# EAGLE board Mini games (EAGLE 9.7.0)

Size 202.73 x 241.54 mm. Coordinates in mm from the lower left corner, seen from the top.
Outline: 0,0 202.73,0 202.73,241.54 0,241.54 0,0
Copper layers (1*16): Top 0.035mm / dielectric 1.5mm / Bottom 0.035mm
Design rules "default": minimum track width 6mil, minimum drill 0.35mm, track to track 6mil, track to pad 6mil, pad to pad 6mil, via to via 6mil, smd to smd 6mil, copper to edge 40mil, drill to drill 6mil, minimum pad ring 10mil, minimum via ring 8mil, stop-mask expansion 4mil, vias tented up to drill 0mil, thermal gap 10mil

## Footprints (pad centres in the part's own frame; a part is rotated, then mirrored left to right if it is on the bottom)
RESAD1016W63L850D250B = drill 0.83 pad 1.43: 1 -5.08,0; 2 5.08,0
SWITCH-MOMENTARY-PTH-6.5MM = drill 1.016 pad 1.88: 1 -3.251,2.261; 2 3.251,2.261; 3 -3.251,-2.261; 4 3.251,-2.261
JHD-162A = drill 1.016 long: 1 -19.05,0; 2 -16.51,0; 3 -13.97,0; 4 -11.43,0; 5 -8.89,0; 6 -6.35,0; 7 -3.81,0; 8 -1.27,0; 9 1.27,0; 10 3.81,0; 11 6.35,0; 12 8.89,0; 13 11.43,0; 14 13.97,0; 15 16.51,0; 16 19.05,0
ARDUINO-UNO-R3-SHIELD = drill 1.016 pad 1.88: 3.3V 24.13,-2.54; 5V 24.13,0; A0 24.13,12.7; A1 24.13,15.24; A2 24.13,17.78; A3 24.13,20.32; A4 24.13,22.86; A5 24.13,25.4; AREF -24.13,-13.97; D2 -24.13,20.32; D3 -24.13,17.78; D4 -24.13,15.24; D5 -24.13,12.7; D6 -24.13,10.16; D7 -24.13,7.62; D8 -24.13,3.81; D9 -24.13,1.27; D10 -24.13,-1.27; D11 -24.13,-3.81; D12 -24.13,-6.35; D13 -24.13,-8.89; GND@0 24.13,2.54; GND@1 24.13,5.08; GND@2 -24.13,-11.43; IOREF 24.13,-7.62; NC 24.13,-10.16; RES 24.13,-5.08; RX -24.13,25.4; SCL -24.13,-19.05; SDA -24.13,-16.51; TX -24.13,22.86; VIN 24.13,7.62

## Placement (x,y rotation side)
R1  1k  [RESAD1016W63L850D250B]  41.99,86.52 0 top
R2  1k  [RESAD1016W63L850D250B]  193.76,99.5 0 top
R3  1k  [RESAD1016W63L850D250B]  90.4,232.57 270 top
R4  1k  [RESAD1016W63L850D250B]  105.64,232.57 270 top
R8  1k  [RESAD1016W63L850D250B]  8.97,94.14 0 top
R9  1k  [RESAD1016W63L850D250B]  8.97,142.4 0 top
R10  1k  [RESAD1016W63L850D250B]  8.97,122.08 0 top
R11  1k  [RESAD1016W63L850D250B]  193.76,119.82 0 top
R12  1k  [RESAD1016W63L850D250B]  193.76,140.14 0 top
S1  SWITCH_MOMENTARY  [SWITCH-MOMENTARY-PTH-6.5MM]  174.71,117.28 0 top
S2  SWITCH_MOMENTARY  [SWITCH-MOMENTARY-PTH-6.5MM]  87.86,213.52 90 top
S3  SWITCH_MOMENTARY  [SWITCH-MOMENTARY-PTH-6.5MM]  174.71,96.96 0 top
S4  SWITCH_MOMENTARY  [SWITCH-MOMENTARY-PTH-6.5MM]  25.48,119.54 0 top
S5  SWITCH_MOMENTARY  [SWITCH-MOMENTARY-PTH-6.5MM]  103.1,213.52 90 top
S6  SWITCH_MOMENTARY  [SWITCH-MOMENTARY-PTH-6.5MM]  174.71,137.6 0 top
S7  SWITCH_MOMENTARY  [SWITCH-MOMENTARY-PTH-6.5MM]  25.48,139.86 0 top
S8  SWITCH_MOMENTARY  [SWITCH-MOMENTARY-PTH-6.5MM]  25.48,91.6 0 top
U2  LCD-16X2JHD-162A  [JHD-162A]  72.48,36.63 0 top
U3  ARDUINO-UNO-R3-SHIELD  [ARDUINO-UNO-R3-SHIELD]  98.8,143.82 90 top

## Library data of the parts
R1-R4 R8-R12 S1-S8 U2 U3 = Tinkercad

## Nets
U2_LED+: R1.1 U2.15
U3_5V: R1.2 S1.3 S1.4 S2.1 S2.2 S3.3 S3.4 S4.3 S4.4 S5.1 S5.2 S6.3 S6.4 S7.3 S7.4 S8.3 S8.4 U2.2 U3.5V
U3_A0: R4.2 S5.3 S5.4 U3.A0
U3_A1: R3.2 S2.3 S2.4 U3.A1
U3_D2: U2.11 U3.D2
U3_D3: U2.12 U3.D3
U3_D4: U2.13 U3.D4
U3_D5: U2.14 U3.D5
U3_D6: R8.2 S8.1 S8.2 U3.D6
U3_D7: R10.2 S4.1 S4.2 U3.D7
U3_D8: R9.2 S7.1 S7.2 U3.D8
U3_D9: R2.1 S3.1 S3.2 U3.D9
U3_D10: R11.1 S1.1 S1.2 U3.D10
U3_D11: R12.1 S6.1 S6.2 U3.D11
U3_D12: U2.6 U3.D12
U3_D13: U2.4 U3.D13
U3_GND: R2.2 R3.1 R4.1 R8.1 R9.1 R10.1 R11.2 R12.2 U2.1 U2.3 U2.5 U2.16 U3.GND@0 U3.GND@1 U3.GND@2

## Tracks (layer width: path | path; a pad name or v marks a point on that pad's centre or on a via)
U2_LED+  (1 unrouted)
U3_5V  (18 unrouted)
U3_A0  (3 unrouted)
U3_A1  (3 unrouted)
U3_D2  (1 unrouted)
U3_D3  (1 unrouted)
U3_D4  (1 unrouted)
U3_D5  (1 unrouted)
U3_D6  (3 unrouted)
U3_D7  (3 unrouted)
U3_D8  (3 unrouted)
U3_D9  (3 unrouted)
U3_D10  (3 unrouted)
U3_D11  (3 unrouted)
U3_D12  (1 unrouted)
U3_D13  (1 unrouted)
U3_GND  (14 unrouted)